# Altium PCB PCB1.PcbDoc
Units mm, origin at the board's own origin, x right, y up, seen from the top; angles counter-clockwise.
Board outline 11 x 20 mm, 2 copper layers (Top Layer, Bottom Layer), stack 1.67 mm thick; 5 components, 4 nets, 10 pads, 2 vias.
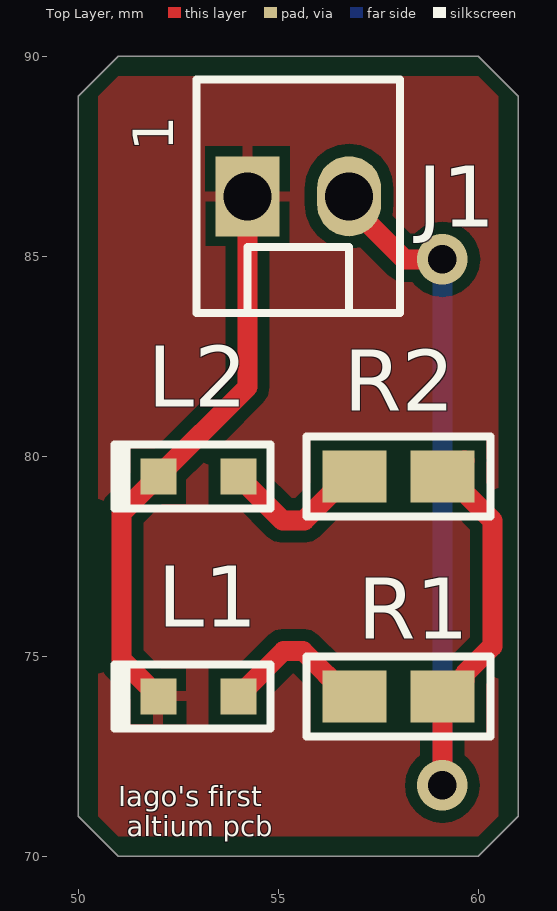
[diagram p0: Top Layer view]
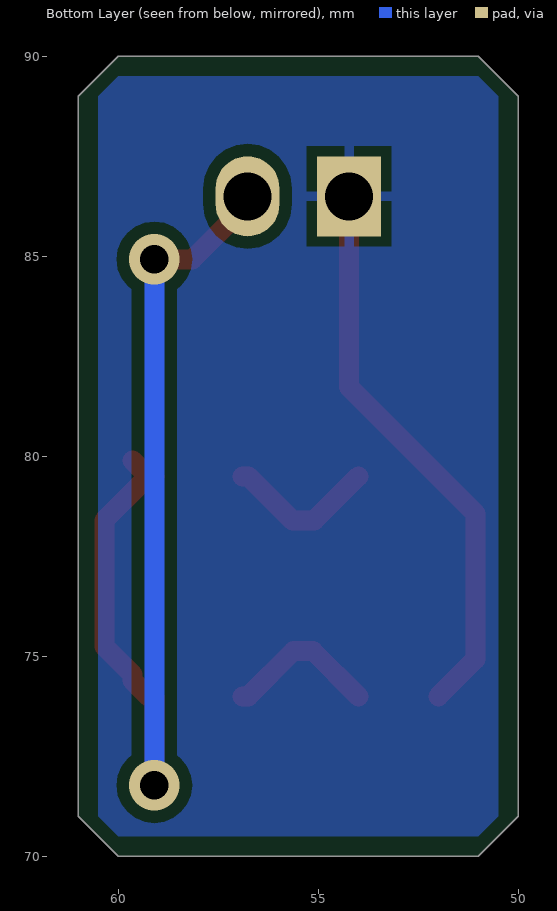
[diagram p1: Bottom Layer view, seen from below]
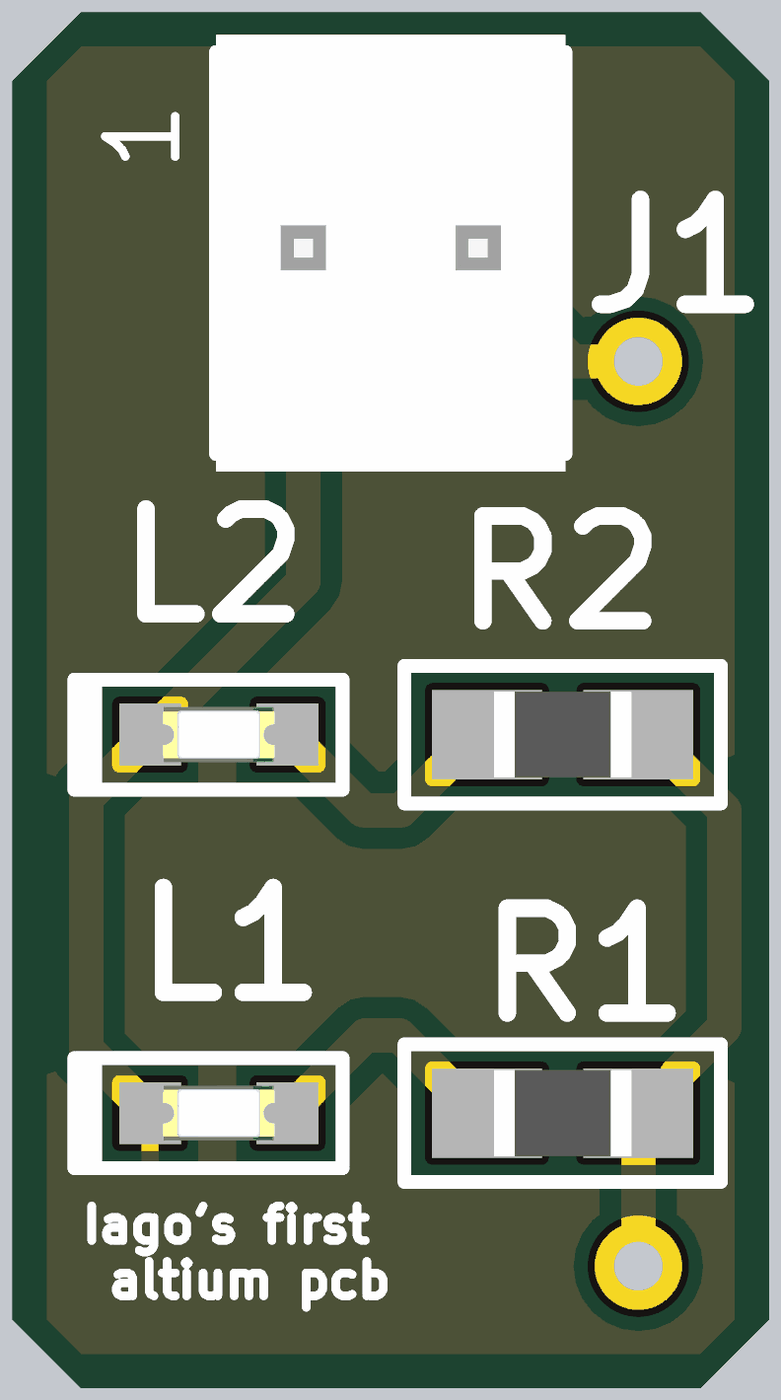
[diagram p2: 3D render of the assembled board from above, using the file's embedded part models]

## Layer stack, top to bottom
Top Solder: solder mask 0.0254, SM-001, Dk 4
Top Layer: signal copper 0.035
Dielectric 1: core 1.6, Core-043, Dk 4.3
Bottom Layer: signal copper 0.035
Bottom Solder: solder mask 0.0254, SM-001, Dk 4

## Board outline
51,90 60,90 61,89 61,71 60,70 51,70 50,71 50,89

## Design rules (kind name [scope] priority, off if disabled: settings)
Clearance [All] p1: gap=0.3 ignorepadtopadclearanceinfootprint=FALSE
PolygonConnect [All] p1: connectstyle=Relief reliefconductorwidth=0.254 reliefentries=4 polygonreliefangle="90 Angle" airgapwidth=0.254
RoutingVias [All] p1: holewidth=0.3 width=0.6 viastyle="Through Hole" minholewidth=0.3 minwidth=0.6 maxholewidth=0.3 maxwidth=0.6
SolderMaskExpansion [All] p1: expansion=0.102 istentingtop=FALSE
Width [All] p1: maxlimit=1 minlimit=0.5 preferedwidth=0.5
30 further rules are at their usual default settings.

## Components (designator, comment, footprint, x,y, rotation, side; value= is the part's Value field where it differs from the comment)
J1 "1x2 Header" HEADER1X2 55.5,86.5 r90 top
L1 "LED" LED 53,74 r180 top
L2 "LED" LED 53,79.5 r180 top
R1 "360R" R0805 58,74 r0 top
R2 "360R" R0805 58,79.5 r0 top

## Footprints (in the part's own frame and the unit in brackets; to place one, negate y for a bottom-side part, rotate by r counter-clockwise, add the part's x,y. Pads: shape width x height; smd on the part's side, far side on the other; paste and mask are expansions set on the pad)
HEADER1X2 [mm]
  rect 2x1.6 hole 1.2: 1(0,1.27)
  oval 2x1.6 hole 1.2: 2(0,-1.27)
  silkscreen extent -2.92,-2.54 2.92,2.54, body extent -3.18,-2.54 3.17,2.54, height 10.68
LED [mm]
  rect 0.9x0.9 smd: 1(-1,0) 2(1,0)
  silkscreen extent -1.8,-0.8 2.1,0.8, body extent -0.81,-0.4 0.81,0.4, height 0.6
R0805 [mm]
  rect 1.6x1.3 smd: 1(-1.1,0) 2(1.1,0)
  silkscreen extent -2.3,-1 2.3,1, body extent -1,-0.62 1,0.63, height 0.5

## Part data
J1: library part 22-23-2021, "Connector Wire to Board Header 2 Position 2.54mm Solder Stra", Color=White, Contact Resistance=10mR, Current Rating=4A, Flammability Rating="UL94 V-0", Insulation Resistance=500GR, Manufacturer=Molex, Max Operating Temperature=75°C, Min Operating Temperature=0°C, Package Quantity=3000, Supplier Part Number 1=900-0022232021-ND, Voltage Rating=250V, Approvals=UL,CSA, Categori="Connectors, Interconnects", Category="Headers and Wire Housings", ComponentLink1Description=https://datasheet.ciiva.com/19454/232266-19454304.pdf?src-supplier=Jameco, ComponentLink1URL=https://datasheet.ciiva.com/19454/232266-19454304.pdf?src-supplier=Jameco, ComponentLink2Description=https://datasheet.ciiva.com/5150/0022232021-pcb-headers-227096-5150681.pdf?src-supplier=Mouser, ComponentLink2URL=https://datasheet.ciiva.com/5150/0022232021-pcb-headers-227096-5150681.pdf?src-supplier=Mouser, ComponentLink3Description=https://datasheet.ciiva.com/22683/1834442-22683561.pdf?src-supplier=Element14, ComponentLink3URL=https://datasheet.ciiva.com/22683/1834442-22683561.pdf?src-supplier=Element14, ComponentLink4Description=https://datasheet.ciiva.com/11746/0900766b80d8f4d1-11746058.pdf?src-supplier=RSComponents, ComponentLink4URL=https://datasheet.ciiva.com/11746/0900766b80d8f4d1-11746058.pdf?src-supplier=RSComponents, ComponentLink5Description=https://datasheet.ciiva.com/30253/114200022232021-pcb-headers-30253002.pdf?src-supplier=Onlinecomponents.com, ComponentLink5URL=https://datasheet.ciiva.com/30253/114200022232021-pcb-headers-30253002.pdf?src-supplier=Onlinecomponents.com, ComponentLink6Description=https://datasheet.ciiva.com/9468/0022232021-pcb-headers-9468476.pdf?src-supplier=Avnet, ComponentLink6URL=https://datasheet.ciiva.com/9468/0022232021-pcb-headers-9468476.pdf?src-supplier=Avnet, ComponentLink7Description=https://datasheet.ciiva.com/18453/70190606-18453638.pdf?src-supplier=Allied+Electronics, ComponentLink7URL=https://datasheet.ciiva.com/18453/70190606-18453638.pdf?src-supplier=Allied+Electronics, ComponentLink8Description=https://datasheet.ciiva.com/16658/0022232021-pcb-headers-16658167.pdf?src-supplier=Avnet+Europe, ComponentLink8URL=https://datasheet.ciiva.com/16658/0022232021-pcb-headers-16658167.pdf?src-supplier=Avnet+Europe, Contact Material=Brass, Contact Plating=Tin,Copper, Depth=6.35mm, Gender=Male, Glow Wire Compliant=Non-compliant, Halogen Free="Low Halogen", Height=10.67mm, Housing Color=White, Housing Material=Nylon, Lead Free="Lead Free", Length=5.08mm, Manufacturer Part Number=22-23-2021, Max Current Rating=4A, Mount="Through Hole", Number of Circuits=2, Number of Contacts=2, Number of Positions=2, Number of Rows=1, Orientation=Straight, Packaging=Bulk, Pitch=2.54mm, Pricing 1="1=0,17000, 10=0,16100, 100=0,11150, 500=0,09438, 1000=0,07722, 5000=0,06864, 10000=0,06221 (USD)", Radiation Hardening=No, REACH SVHC=Unknown, RoHS=Yes, Stock 1=56479, Supplier 1=Digi-Key, Termination="Through Hole", Voltage Rating (DC)=250V
L1 L2: library part LNJ926W8CRA, "CHIPLED, 0603, BLUE, 11.5MCD, 470NM", Case Code (Imperial)=0603, Case Code (Metric)=1608, Color=Blue, Forward Current=5mA, Forward Voltage=2.9V, Manufacturer="Panasonic SSG", Max Operating Temperature=85°C, Min Operating Temperature=-30°C, Package Quantity=5000, Reverse Voltage=5V, Supplier Part Number 1=P13484CT-ND, Case/Package=0603, Categorie=Optoelectronics, Category=LEDs, ComponentLink1Description=https://datasheet.ciiva.com/4688/lnj926w8cra-cek-226062-4688285.pdf?src-supplier=Mouser, ComponentLink1URL=https://datasheet.ciiva.com/4688/lnj926w8cra-cek-226062-4688285.pdf?src-supplier=Mouser, ComponentLink2Description=https://datasheet.ciiva.com/8028/lnj926w8cra-cek-8028642.pdf?src-supplier=Element14, ComponentLink2URL=https://datasheet.ciiva.com/8028/lnj926w8cra-cek-8028642.pdf?src-supplier=Element14, ComponentLink3Description=https://datasheet.ciiva.com/11775/0900766b80f0a8cd-11775371.pdf?src-supplier=RSComponents, ComponentLink3URL=https://datasheet.ciiva.com/11775/0900766b80f0a8cd-11775371.pdf?src-supplier=RSComponents, Dominant Wavelength=470nm, Height=0.35mm, Illumination Color=Blue, Lead Free="Lead Free", Length=1.6mm, Lens Style=Rectangular, Luminous Intensity=11.5mcd, Manufacturer Part Number=LNJ926W8CRA, Mount="Surface Mount", Number of LEDs=1, Number of Pins=2, Packaging="Tape and Reel", Pricing 1="1=0,34000, 10=0,26300, 100=0,21780, 500=0,19932, 1000=0,19272 (USD)", REACH SVHC=Yes, RoHS=Yes, Stock 1=11665, Supplier 1=Digi-Key, Test Current=5mA, Wavelength=470nm, Width=0.8mm
R1 R2: library part CRCW0805360RFKEA, "Res Thick Film 0805 360 Ohm 1% 0.125W(1/8W) ±100ppm/C Molded SMD Automotive Paper T/R", Case Code (Imperial)=0805, Case Code (Metric)=2012, Manufacturer=Vishay, Max Operating Temperature=155°C, Max Power Dissipation=125mW, Min Operating Temperature=-55°C, Package Quantity=10, Supplier Part Number 1=541-360CCT-ND, Temperature Coefficient=100ppm/°C, Tolerance=1%, Voltage Rating=150V, Case/Package=0805, Categorie=Resistors, Category="Chip SMD Resistors", ComponentLink1Description=https://datasheet.ciiva.com/2467/dcrcwe3-2467773.pdf?src-supplier=Digi-Key, ComponentLink1URL=https://datasheet.ciiva.com/2467/dcrcwe3-2467773.pdf?src-supplier=Digi-Key, Composition="Thick Film", Contact Plating=Tin, Depth=1.25mm, Features="Automotive AEC-Q200", Height=0.45mm, Lead Free="Lead Free", Length=2mm, Manufacturer Part Number=CRCW0805360RFKEA, Military Standard=Not, Number of Pins=2, Number of Terminals=2, Number of Terminations=2, Packaging="Tape and Reel", Power Rating=125mW, Pricing 1="1=0,10000, 10=0,06200, 100=0,02540, 1000=0,01142, 2500=0,00991 (USD)", Radiation Hardening=No, REACH SVHC=Unknown, Resistance=360R, RoHS=Yes, Stock 1=19728, Supplier 1=Digi-Key, Termination=SMD/SMT, Voltage Rating (DC)=150V, Weight=0.000194oz, Width=0.049inch

## Via types
v1: diameter 1.27, hole 0.711, Top Layer to Bottom Layer, 2 vias

## Nets (pads, with @x,y where several pads share a name; then routed paths per layer and width w, separated by ;. In a path a pad name is that pad's centre, name@x,y a point inside that pad or via, vN(x,y) a via of type N, cw(c..) or ccw(c..) an arc to the next point about the centre after c; other vN are vias at no path point)
+3V3: J1.2 R1.2 R2.2 | length 25.8
  Top Layer w0.5: J1.2 56.77,86.3 58.145,84.925 v1(59.1,84.925) ; v1(59.1,71.775) R1.2 59.25,74 59.65,74.4 59.65,74.55 60.35,75.25 60.35,78.4 R2.2@59.25,79.5 ; R2.2 R2.2@59.25,79.5 ; R2.2@59.65,79.9 R2.2@59.25,79.5
  Bottom Layer w0.5: v1(59.1,71.775) v1(59.1,84.925)
GND: J1.1 L1.2 L2.2 | length 14.2
  Top Layer w0.5: L1.2 51.075,74.925 51.075,78.575 L2.2 54.23,81.73 J1.1
LED1: L1.1 R1.1 | length 3.8
  Top Layer w0.5: L1.1 55.13,75.13 55.62,75.13 56.75,74 R1.1
LED2: L2.1 R2.1 | length 3.8
  Top Layer w0.5: L2.1 55.1,78.4 55.65,78.4 56.75,79.5 R2.1

## Polygon pours and split planes (outlines as drawn)
GND on Top Layer "GND_L01_P005" (solid, pour order 5): 51,89.5 50.5,89 50.5,71 51,70.5 60,70.5 60.5,71 60.5,89 60,89.5
GND on Top Layer "GND_L01_P006" (solid, pour order 6): 63.5,90
GND on Top Layer "GND_L01_P004" (solid, pour order 4): 51.5,89.5
GND on Bottom Layer "GND_L02_P009" (solid, pour order 9): 51,89.5 50.5,89 50.5,71 51,70.5 60,70.5 60.5,71 60.5,89 60,89.5
GND on Bottom Layer "GND_L02_P010" (solid, pour order 10): 52.5,88.5

## Silkscreen, mask and mechanical layers (free items; w line width, h text height)
Top Overlay:
  text "Iago's first /  altium pcb" at 51,70.5 h0.5
Board outline:
  the board outline again, w0.2

## Text inside footprints (layer, text, board x,y; h text height)
J1: Top Overlay "1" at 52.373,87.627 h1.02 r90